# Altium PCB pastilda.PcbDoc
Units mm, origin at the board's own origin, x right, y up, seen from the top; angles counter-clockwise.
Board outline 40 x 17 mm, 4 copper layers (Top Layer, Ground, Power, Bottom Layer), stack 1.58 mm thick; 46 components, 39 nets, 188 pads, 88 vias.
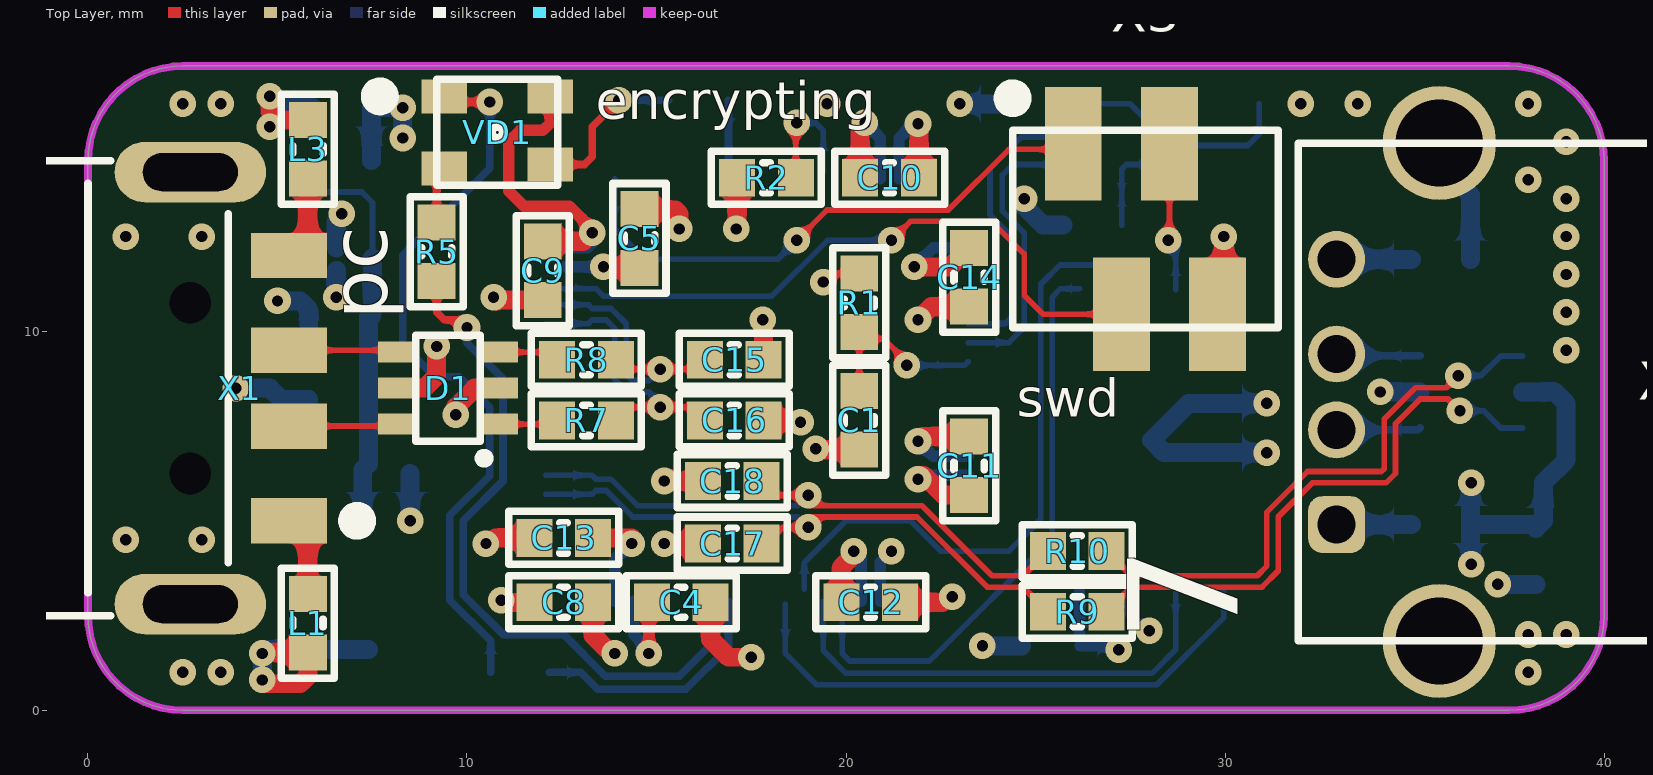
[diagram p0: Top Layer view]
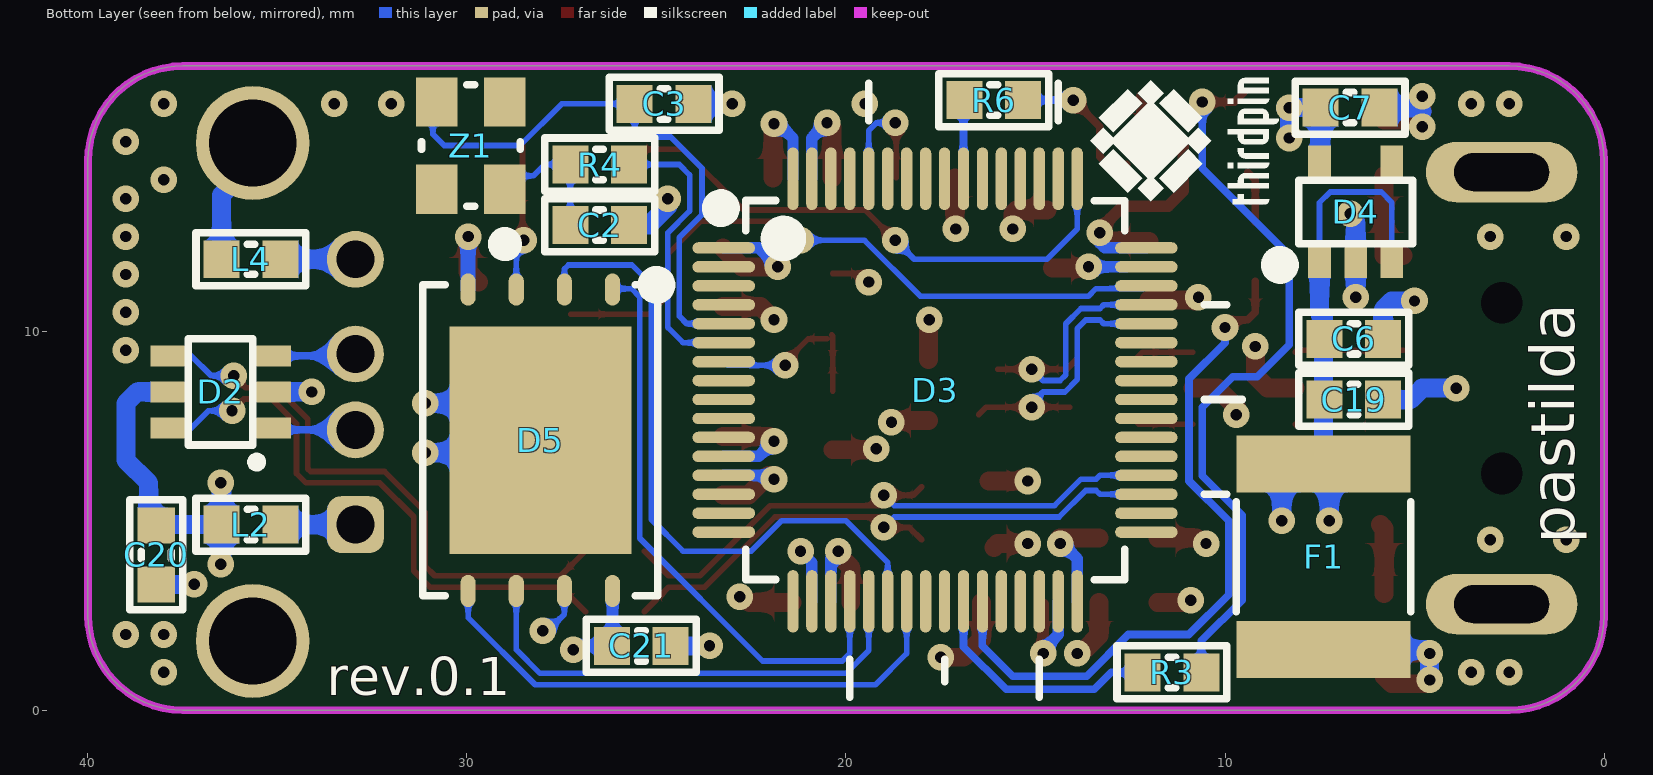
[diagram p1: Bottom Layer view, seen from below]
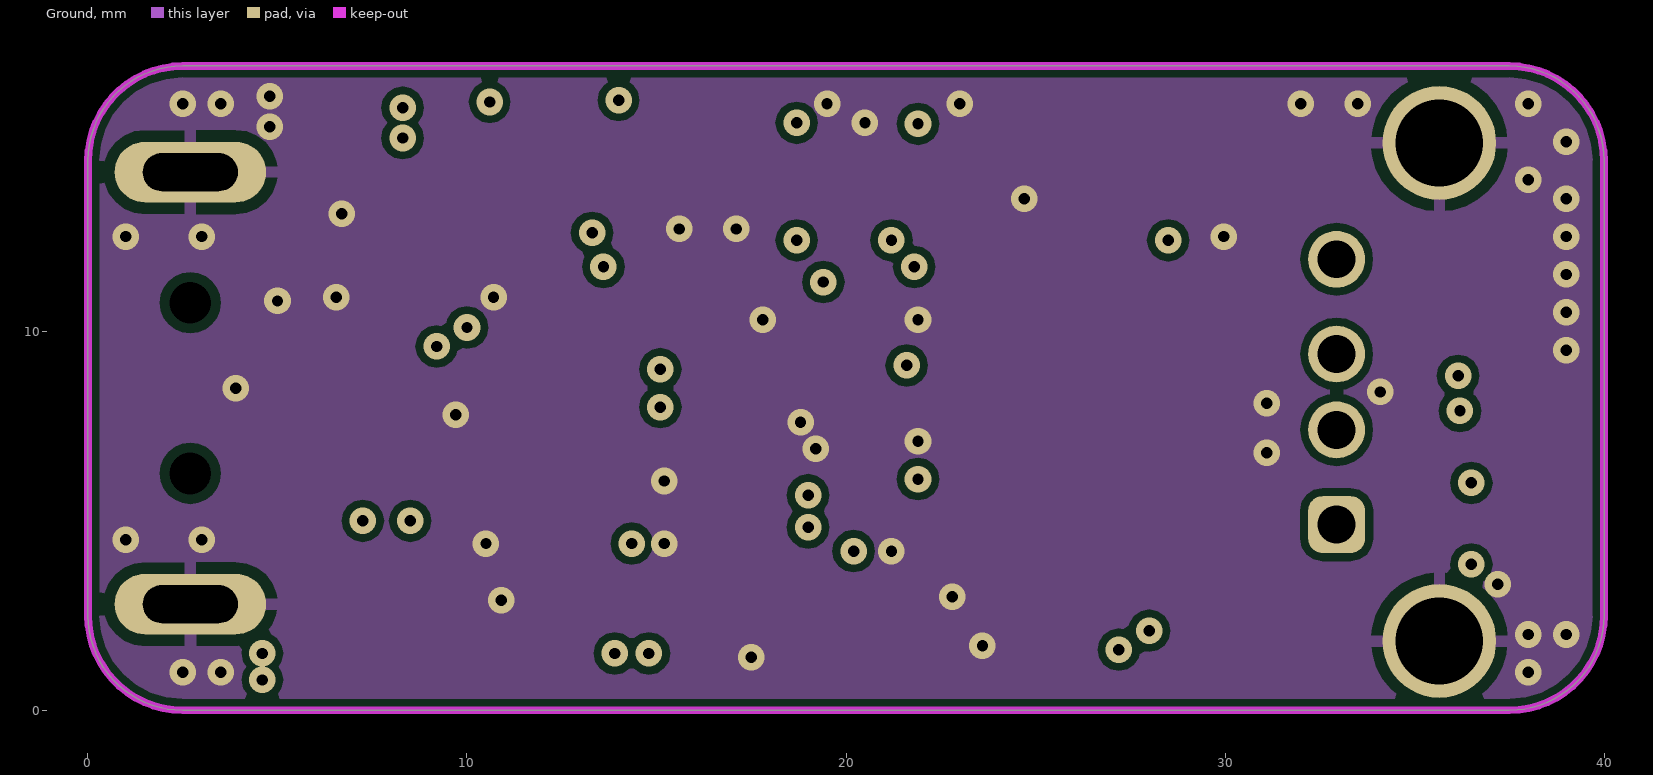
[diagram p2: Ground]
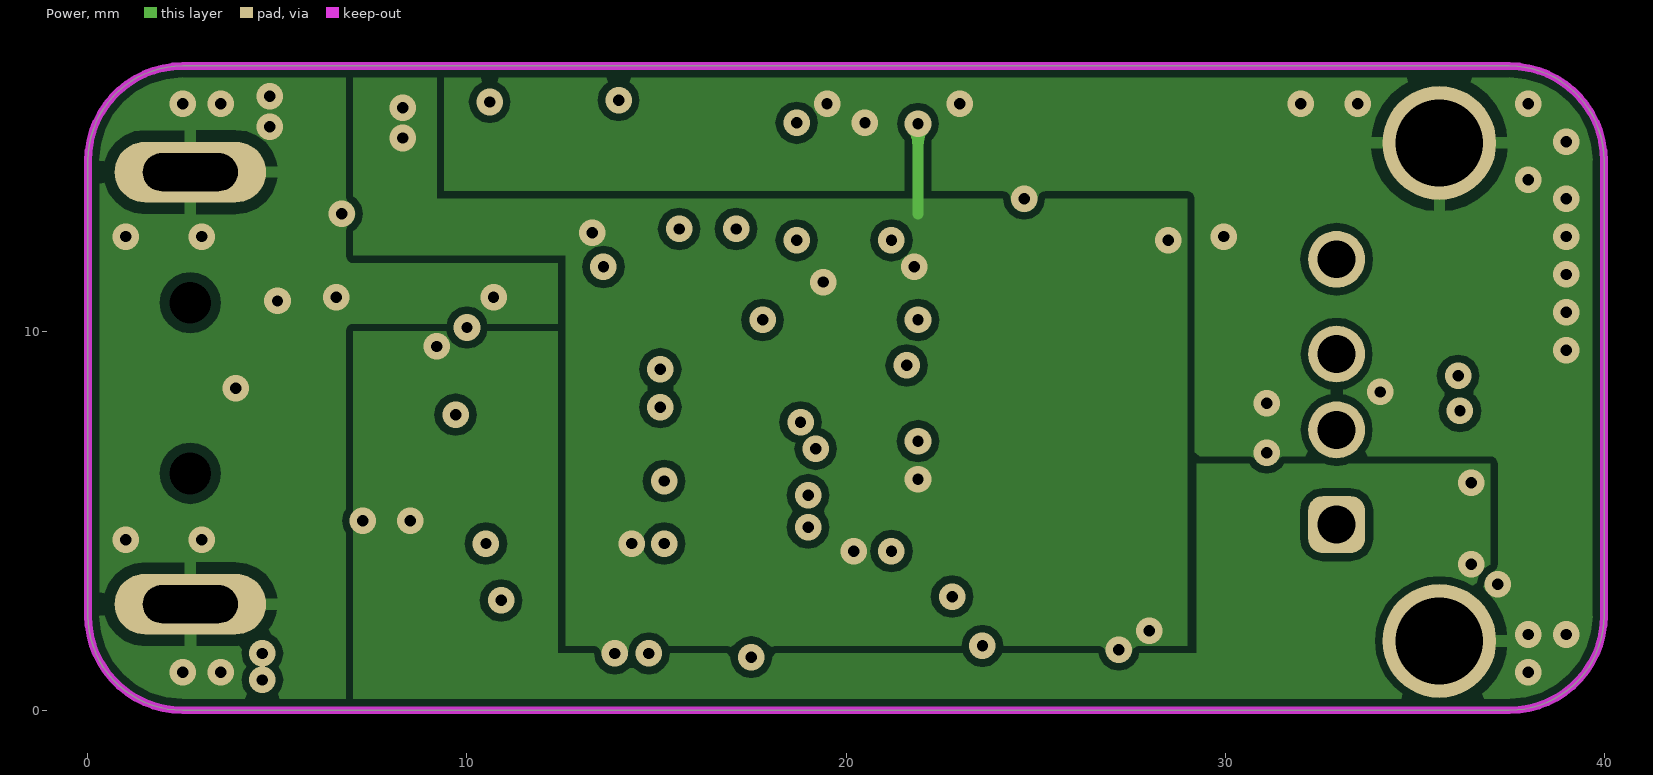
[diagram p3: Power]

## Layer stack, top to bottom
Top Solder: solder mask 0.0102, Solder Resist, Dk 3.5
Top Layer: signal copper 0.018
2116x2: prepreg 0.254, FR-4, Dk 4.25
Ground: signal copper 0.018
Dielectric 3: core 1, FR-4, Dk 4.6
Power: signal copper 0.018
2116x2: prepreg 0.254, FR-4, Dk 4.25
Bottom Layer: signal copper 0.018
Bottom Solder: solder mask 0.0102, Solder Resist, Dk 3.5

## Board outline
0,2.5 0,14.5 cw(c2.5,14.5) 2.5,17 37.5,17 cw(c37.5,14.5) 40,14.5 40,2.5 cw(c37.5,2.5) 37.5,0 2.5,0 cw(c2.5,2.5)

## Design rules (kind name [scope] priority, off if disabled: settings)
AssemblyTestpoint [All] p1: testpointundercomponent=TRUE minsize=1.016 maxsize=2.54 preferedsize=1.524 minholesize=0 maxholesize=1.016 preferedholesize=0.813 testpointgrid=0.025 usegrid=FALSE gridtolerance=0 allowsidetop=TRUE allowsidebottom=TRUE
Clearance "MH pow gnd" [IsPadHoleValid and not PadIsPlated] p1: gap=0.25
Clearance Clearance_Poly_inside [InPolygonClass('All Polygons') and OnMid] p2: gap=0.2
Clearance Clearance_Poly_outside [InPolygonClass('All Polygons') and OnOutside] p3: gap=0.2
Clearance Clearance_inside [All vs OnMid] p4: gap=0.15
Clearance Clearance_all [All] p5: gap=0.15
ComponentClearance [Not InComponentClass('ConnectorsVIol') vs Not InComponentClass('ConnectorsVIol')] p1: gap=0.1 collisioncheckmode=3 verticalgap=0.1 showdistances=FALSE
DiffPairsRouting [All] p1: maxlimit=0.3 minlimit=0.15 mostfreqgap=0.2 toplayer_prefgap=0.15 toplayer_minwidth=0.15 toplayer_maxwidth=0.381 toplayer_prefwidth=0.2 midlayer1_mingap=0.2 midlayer1_minwidth=0.2 midlayer1_maxwidth=0.381 midlayer1_prefwidth=0.2 midlayer2_mingap=0.2 midlayer2_minwidth=0.2 midlayer2_maxwidth=0.381 midlayer2_prefwidth=0.2 bottomlayer_prefgap=0.15 bottomlayer_minwidth=0.15 bottomlayer_maxwidth=0.381 bottomlayer_prefwidth=0.2 maxuncoupledlength=20
FabricationTestpoint [All] p1: side=3 testpointundercomponent=TRUE minsize=1.016 maxsize=2.54 preferedsize=1.524 minholesize=0 maxholesize=1.016 preferedholesize=0.813 testpointgrid=0.025 allowsidetop=TRUE allowsidebottom=TRUE usegrid=FALSE gridtolerance=0
Height [All] p1: minheight=0 maxheight=18 prefheight=9
HoleSize [All] p1: absolutevalues=TRUE maxlimit=12 minlimit=0.3 maxpercent=80.000 minpercent=20.000
MinimumSolderMaskSliver [All] p1: minsoldermaskwidth=0
PlaneClearance PlaneClearance_2 [OnLayer('Power')] p1: clearance=0.4
PlaneClearance PlaneClearance_1 [OnLayer('GND')] p2: clearance=0.4
PlaneClearance [All] p3: clearance=0.3
PolygonConnect Direct_PadClass [inpadclass('Direct')] p1: connectstyle=Direct reliefconductorwidth=0.254 reliefentries=4 polygonreliefangle="90 Angle" airgapwidth=0.254
PolygonConnect Thru_OnMid [IsThruPin vs OnMid] p2: connectstyle=Relief reliefconductorwidth=0.3 reliefentries=4 polygonreliefangle="90 Angle" airgapwidth=0.3
PolygonConnect Direct_PolyClass [IsSMTPin vs InPolygonClass('direct')] p3: connectstyle=Direct reliefconductorwidth=0.4 reliefentries=4 polygonreliefangle="90 Angle" airgapwidth=0.254
PolygonConnect Poly_Via [isVia vs IsPolygon] p4: connectstyle=Direct reliefconductorwidth=0.254 reliefentries=4 polygonreliefangle="90 Angle" airgapwidth=0.254
PolygonConnect all [All] p5: connectstyle=Relief reliefconductorwidth=0.254 reliefentries=4 polygonreliefangle="90 Angle" airgapwidth=0.254
RoutingVias [All] p1: holewidth=0.3 width=0.7 viastyle="Through Hole" minholewidth=0.3 minwidth=0.7 maxholewidth=0.5 maxwidth=1
ShortCircuit ShortCircuit_MH [InPadClass('Plated mounting holes') vs OnLayer('Keep-Out Layer')] p1: allowed=TRUE
ShortCircuit [All] p2: allowed=FALSE
SilkToBoardRegionClearance [not All] p1:
SilkToSilkClearance [All vs not All] p1: silktosilkclearance=0.254
SilkToSolderMaskClearance SilkscreenOverComponentPads [IsPad] p1: minsilkscreentomaskgap=-1 clearancetoexposedcopper=TRUE
SolderMaskExpansion Via [IsVia] p1: expansion=-1
SolderMaskExpansion [All] p2: expansion=0.075
Width Width_inside [OnMid] p1: maxlimit=5 minlimit=0.2 preferedwidth=0.3
Width [All] p2: maxlimit=5 minlimit=0.15 preferedwidth=0.3
18 further rules are at their usual default settings.

## Classes and differential pairs
pad class "Mounting Holes": X1-0
differential pair F_OTG_HS_D: +F_OTG_HS_D_P -F_OTG_HS_D_N
differential pair OTG_HS_D: +OTG_HS_D_P -OTG_HS_D_N
differential pair OTG_FS_D: +OTG_FS_D_P -OTG_FS_D_N

## Components (designator, comment, footprint, x,y, rotation, side; value= is the part's Value field where it differs from the comment)
C1 "C" 0603C 20.35,7.65 r90 top
C2 "C" 0603C 26.5,12.8 r180 bottom
C3 "C" 0603C 24.8,16 r180 bottom
C4 "C" 0603C 15.65,2.85 r0 top
C5 "C" 0603C 14.55,12.45 r90 top
C6 "C" 0603C 6.6,9.8 r0 bottom
C7 "C" 0603C 6.7,15.9 r0 bottom
C8 "C" 0603C 12.55,2.85 r0 top
C9 "C" 0603C 12,11.6 r90 top
C10 "C" 0603C 21.15,14.05 r0 top
C11 "C" 0603C 23.25,6.45 r270 top
C12 "C" 0603C 20.65,2.85 r180 top
C13 "C" 0603C 12.55,4.55 r0 top
C14 "C" 0603C 23.25,11.425 r90 top
C15 "C" 0603C 17.05,9.25 r180 top
C16 "C" 0603C 17.05,7.65 r180 top
C17 "C" 0603C 17,4.4 r0 top
C18 "C" 0603C 17,6.05 r0 top
C19 "C" 0603C 6.6,8.2 r0 bottom
C20 "C" 0603C 38.2,4.1 r90 bottom
C21 "C" 0603C 25.4,1.7 r0 bottom
D1 "USBLC6-2" SOT23-6 9.5,8.5 r180 top
D2 "USBLC6-2" SOT23-6 36.5,8.4 r0 bottom
D3 "STM32F405RG" LQFP64 17.65,8.45 r180 bottom
D4 "TPS76333DBV" SOT23-5 6.553,13.15 r90 bottom
D5 "SST25VF064C-80-4I-Q2A" WSON8_6X8 28.065,7.125 r270 bottom
F1 "MF-SMDF050-2" F2018 7.4,1.6 r90 bottom
L1 "BLM18AG" 0603C 5.8,2.3 r270 top
L2 "BLM18AG" 0603C 35.7,4.9 r180 bottom
L3 "BLM18AG" 0603C 5.8,14.8 r90 top
L4 "BLM18AG" 0603C 35.7,11.9 r180 bottom
R1 "R" 0603R 20.35,10.75 r90 top
R2 "R" 0603R 17.9,14.05 r180 top
R3 "R" 0603R 11.4,1 r180 bottom
R4 "R" 0603R 26.5,14.4 r0 bottom
R5 "R" 0603R 9.2,12.1 r90 top
R6 "R" 0603R 16.1,16.1 r180 bottom
R7 "R" 0603R 13.15,7.65 r0 top
R8 "R" 0603R 13.15,9.25 r0 top
R9 "R" 0603R 26.1,2.6 r180 top
R10 "R" 0603R 26.1,4.2 r180 top
VD1 "FYLS-3528RGBC" FYLS-3528 10.8,15.25 r180 top
X1 "1734028-1" 1734028-1 2.7,8.5 r270 top locked
X2 "292303-1" 292303-1 34.3,8.4 r90 top locked
X3 "7-188275-4" 7-188275-4 27.9,12.7 r0 top
Z1 "KX-7" KX-7 29.9,14.9 r90 bottom

## Footprints (in the part's own frame and the unit in brackets; to place one, negate y for a bottom-side part, rotate by r counter-clockwise, add the part's x,y. Pads: shape width x height; smd on the part's side, far side on the other; paste and mask are expansions set on the pad)
7-188275-4 [mm]
  rect 1.5x3 smd: 1(-1.905,2.25) 2(-0.635,-2.25) 3(0.635,2.25) 4(1.905,-2.25)
  silkscreen extent -3.75,-2.6 3.51,3.7, body extent -3.51,-3.45 3.51,3.45, height 5.3
0603C [mm] "Chip Cap, 2-Leads, Body 1,5x0,8mm, IPC Medium Density"
  rect 0.95x1 smd: 1(-0.775,0) 2(0.775,0)
  Top Layer pour cut-out: -0.4,0.6 0.4,0.6 0.4,-0.6 -0.4,-0.6
  silkscreen extent -1.45,-0.7 1.45,0.7, body extent -0.93,-0.41 0.93,0.41, height 0.81
0603R [mm] "Chip Resistor, 2-Leads, Body 1,5x0,8mm, IPC Medium Density"
  rect 0.95x1 smd: 1(-0.775,0) 2(0.775,0)
  Top Layer pour cut-out: -0.4,0.6 0.4,0.6 0.4,-0.6 -0.4,-0.6
  silkscreen extent -1.45,-0.7 1.45,0.7, body extent -0.82,-0.41 0.82,0.41, height 0.46
292303-1 [mm] "USB A R/A RCPT ASSY THRU HOLE"
  round 3 hole 2.3: 0(-6.57,-1.355) 0(6.57,-1.355)
  rrect50% 1.5x1.5 hole 1: 1(-3.5,1.355)
  round 1.5 hole 1: 2(-1,1.355) 3(1,1.355) 4(3.5,1.355)
  silkscreen extent -6.57,-11.63 6.57,2.37, body extent -8.12,-11.63 8.12,2.37, height 7.65
1734028-1 [mm] "USB CONN,Plug R/A SMT"
  oval 1.6x4 hole 1 slot 2.5 at 90 deg: 0(-5.7,0) 0(5.7,0)
  round 0 hole 1.1 unplated: 0(-2.25,0) 0(2.25,0)
  rect 1.2x2 smd: 1(3.5,2.6) 2(1,2.6) 3(-1,2.6) 4(-3.5,2.6)
  silkscreen extent -6,-17.65 6,4.65, body extent -6.45,-17.65 6.45,3.2, height 3
F2018 [mm]
  rect 1.5x4.6 smd: 1(0,0) 2(4.9,0)
  silkscreen extent 1,-2.3 3.9,2.3, body extent -0.27,-2.26 5.17,2.25, height 2.03
FYLS-3528 [mm]
  rect 1.2x0.9 smd: 1(1.4,-0.95) 2(-1.4,-0.95) 3(-1.4,0.85) 4(1.4,0.95)
  silkscreen extent -1.6,-1.4 3.35,1.4, body extent -1.75,-1.4 1.75,1.4, height 1.95
KX-7 [mm] "Quartz"
  rect 1.3x1.1 smd: 1(-1.15,-0.9) 2(1.15,0.9) 3(1.15,-0.9) 4(-1.15,0.9)
  silkscreen extent -2.8,-1.3 1.6,1.3, body extent -1.6,-1.3 1.6,1.3, height 0.8
LQFP64 [mm] "LQFP64 – 10 x 10 mm 64 pin low-profile quad flat package"
  oval 1.65x0.3 smd: 1(-5.575,3.75) 2(-5.575,3.25) 3(-5.575,2.75) 4(-5.575,2.25) 5(-5.575,1.75) 6(-5.575,1.25) 7(-5.575,0.75) 8(-5.575,0.25) 9(-5.575,-0.25) 10(-5.575,-0.75) 11(-5.575,-1.25) 12(-5.575,-1.75) 13(-5.575,-2.25) 14(-5.575,-2.75) 15(-5.575,-3.25) 16(-5.575,-3.75) 33(5.575,-3.75) 34(5.575,-3.25) 35(5.575,-2.75) 36(5.575,-2.25) 37(5.575,-1.75) 38(5.575,-1.25) 39(5.575,-0.75) 40(5.575,-0.25) 41(5.575,0.25) 42(5.575,0.75) 43(5.575,1.25) 44(5.575,1.75) 45(5.575,2.25) 46(5.575,2.75) 47(5.575,3.25) 48(5.575,3.75)
  oval 0.3x1.65 smd: 17(-3.75,-5.575) 18(-3.25,-5.575) 19(-2.75,-5.575) 20(-2.25,-5.575) 21(-1.75,-5.575) 22(-1.25,-5.575) 23(-0.75,-5.575) 24(-0.25,-5.575) 25(0.25,-5.575) 26(0.75,-5.575) 27(1.25,-5.575) 28(1.75,-5.575) 29(2.25,-5.575) 30(2.75,-5.575) 31(3.25,-5.575) 32(3.75,-5.575) 49(3.75,5.575) 50(3.25,5.575) 51(2.75,5.575) 52(2.25,5.575) 53(1.75,5.575) 54(1.25,5.575) 55(0.75,5.575) 56(0.25,5.575) 57(-0.25,5.575) 58(-0.75,5.575) 59(-1.25,5.575) 60(-1.75,5.575) 61(-2.25,5.575) 62(-2.75,5.575) 63(-3.25,5.575) 64(-3.75,5.575)
  silkscreen extent -5.9,-8.1 8.1,8.1, body extent -6,-6 6,6, height 1.5
SOT23-5 [mm] "SOT23, 5-Leads, Body 3,0x3,0mm (max), Pitch 0,95mm, IPC Medium Density"
  rect 1x0.6 smd: 1(-1.25,0.953) 2(-1.25,0) 3(-1.25,-0.953) 4(1.25,-0.953) 5(1.25,0.953)
  silkscreen extent -1.65,-1.5 0.83,2.25, body extent -1.5,-1.5 1.5,1.5, height 1.3
SOT23-6 [mm]
  rect 1x0.55 smd: 1(-1.35,0.95) 2(-1.35,0) 3(-1.35,-0.95) 4(1.35,-0.95) 5(1.35,0) 6(1.35,0.95)
  silkscreen extent -1.08,-1.4 0.85,1.97, body extent -1.4,-1.45 1.4,1.45, height 1.45
WSON8_6X8 [mm]
  oval 0.85x0.4 smd: 1(-3.975,1.905) 2(-3.975,0.635) 3(-3.975,-0.635) 4(-3.975,-1.905) 5(3.975,-1.905) 6(3.975,-0.635) 7(3.975,0.635) 8(3.975,1.905)
  rect 6x4.8 smd: 9(0,0)
  silkscreen extent -4.35,-3.1 4.1,3.31, body extent -4.05,-3.05 4.05,3.05, height 0.8

## Part data
C1 C9 C10 C11 C12 C13 C14 C21: library part "C cer 0603 X7R 0.1мк 50В 10% -55…125", "Керамический ЧИП конденсатор"
C2 C3 C15 C16 C17 C18: library part "C cer 0603 NPO 20 50В 5% -55…125", "Керамический ЧИП конденсатор"
C4 C5: library part "C cer 0603 X7R 2.2мк 10В 10% -55…125", "Керамический ЧИП конденсатор"
C6: library part "C cer 0603 X5R 10мк 6.3В 20% -55…85", "Керамический ЧИП конденсатор"
C7 C8: library part "C cer 0603 X5R 1мк 25В 10% -55…85", "Керамический ЧИП конденсатор"
C19 C20: library part "C cer 0603 X7R 0.01мк 50В 10% -55…125", "Керамический ЧИП конденсатор"
D1 D2: library part USBLC6-2SC6, "Very low capacitance ESD protection"
D3: "Микроконтроллер Cortex-M4 1Mb"
D4: "LDO 150mA 3.3-10V to 3.3V"
D5: "64 Mbit SPI Serial Dual I/O Flash"
F1: "Предохранитель"
L1 L2 L3 L4: library part BLM18AG601SN1, "Фильтр"
R1 R2: library part "R 0603 10к 5%", "ЧИП резистор"
R3 R5 R6: library part "R 0603 510 5%", "ЧИП резистор"
R4: library part "R 0603 300 5%", "ЧИП резистор"
R7 R8 R9 R10: library part "R 0603 24 1%", "ЧИП резистор"
VD1: "RGB Светодиод"
X1: "USB A вилка на плату SMD"
X2: "USB A розетка на плату"
X3: "Розетка на плату"
Z1: library part "KX – 7_25M", "Кварцевый резонатор"

## Via types
v1: diameter 0.7, hole 0.3, Top Layer to Bottom Layer, 88 vias

## Nets (pads, with @x,y where several pads share a name; then routed paths per layer and width w, separated by ;. In a path a pad name is that pad's centre, name@x,y a point inside that pad or via, vN(x,y) a via of type N, cw(c..) or ccw(c..) an arc to the next point about the centre after c; other vN are vias at no path point)
3V3: C7.2 C8.2 C9.2 C10.2 C11.2 C12.2 C13.2 C14.2 C21.2 D3.1 D3.13 D3.19 D3.32 D3.48 D3.64 D4.5 D5.3 D5.7 D5.8 R1.2 VD1.2 X3.3 | length 39.4
  Top Layer w0.15: v1(19.4,11.3) 19.625,11.525 R1.2 ; v1@28.5,12.5 28.535,12.535 X3.3
  Top Layer w0.3: VD1.2 12.2,15.5 12,15.3 11.4,15.3 11.1,15 11.1,13.7 11.5,13.3 12.7,13.3 v1@13.2,12.8
  Top Layer w0.5: C9.2 13.075,12.375 v1(13.3,12.6) ; C8.2 13.325,1.975 v1@13.7,1.6 ; C13.2 14.35,4.55 v1@14.4,4.5 ; C12.2 19.875,3.775 v1@20.2,4.1 ; v1(21.8,11.7) 22.75,11.7 C14.2 ; v1@21.876,6.2 22.05,6.2 22.575,5.675 C11.2 ; v1@21.876,15.5 21.925,15.451 C10.2
  Power w0.3: 21.9,13.1 v1(21.9,15.475)
  Bottom Layer w0.15: D5.7 27.43,2.536 27.866,2.1 v1(28,2.1) ; v1(28.5,12.4) 28.7,12.2 D5.3
  Bottom Layer w0.3: D3.48 13.174,12.2 13.3,12.326 v1(13.3,12.6) ; D3.32 13.9,4 14.3,4.4 v1(14.35,4.4) ; v1(20.2,4.2) 20.4,4 D3.19 ; D3.64 21.4,15.1 21.775,15.475 v1(21.9,15.475) ; v1(21.8,11.7) 22.3,12.2 D3.1 ; v1(21.9,6.1) 22,6.2 D3.13 ; C21.2@26.16,1.915 D5.8 ; C21.2 27.1,1.7 v1(27.2,1.6)
  Bottom Layer w0.5: D4.5@7.475,14.5 C7.2 8.4,15.9 v1(8.3,15.9) v1(8.3,15.1)
  other v1: 13.9,1.5
5V: C6.2 C19.2 C20.2 D1.5 D2.5 D4.1 D4.3 F1.2 L2.1 | length 24.2
  Top Layer w0.5: D1.5 8.875,8.5 9.2,8.825 v1(9.2,9.6)
  Bottom Layer w0.15: D4.3 5.6,13.4 5.875,13.675 7.225,13.675 7.506,13.394 7.506,11.931 D4.1
  Bottom Layer w0.5: v1(7.25,5) 7.25,6.35 F1.2 7.4,10.325 7.475,10.4 ; 7.4,10.4 7.506,10.506 D4.1 ; D4.1@7.475,11.9 D4.1@7.506,11.931 ; v1(8.5,5) F1.2@8.5,6.25 ; v1(36.5,3.85) 36.5,3.9 36.475,3.925 L2.1 ; v1(36.5,6) 36.475,5.975 L2.1 ; D2.5 38.7,8.4 39,8.1 39,6.6 38.4,6 38.4,5 C20.2@38.2,4.8 ; C20.2@38.2,4.9 L2.1
BOOT0: D3.60 R2.1 | length 3.3
  Top Layer w0.15: R2.1 18.675,15.475 v1(18.7,15.5)
  Bottom Layer w0.15: v1(18.7,15.5) 19.2,15.5 19.4,15.3 D3.60@19.4,14.2
F_OTG_HS_D_N: D2.6 R9.1 | length 15.2
  Top Layer w0.15: R9.1 27.525,3.25 30.974,3.25 31.405,3.681 31.405,5.105 32.3,6 34.25,6 34.5,6.25 34.5,7.562 35.15,8.212 35.887,8.212 v1(36.2,7.9)
  Bottom Layer w0.15: v1(36.2,7.9) 36.825,7.9 37.275,7.45 D2.6
F_OTG_HS_D_P: D2.4 R10.1 | length 15.2
  Top Layer w0.15: R10.1 27.525,3.55 30.85,3.55 31.105,3.805 31.105,5.229 32.176,6.3 34.126,6.3 34.2,6.374 34.2,7.687 35.026,8.512 35.837,8.512 v1(36.15,8.825)
  Bottom Layer w0.15: v1(36.15,8.825) 36.75,8.825 37.275,9.35 D2.4
GND: C1.1 C2.2 C3.2 C4.2 C5.2 C6.1 C7.1 C8.1 C9.1 C10.1 C11.1 C12.1 C13.1 C14.1 C15.1 C16.1 C17.1 C18.1 C19.1 C20.1 C21.1 D1.2 D2.2 D3.12 D3.18 D3.63 D4.2 D5.4 D5.9 L3.2 L4.1 R2.2 X1.0@2.7,2.8 X1.0@2.7,14.2 X2.0 X3.4 | length 50.3
  Top Layer w0.5: v1(4.8,16.2) 4.8,15.8 5.025,15.575 L3.2 ; v1(9.7,7.8) 9.7,8 10.2,8.5 D1.2 ; v1@10.6,4.4 10.75,4.55 C13.1 ; v1(10.7,10.9) 10.8,10.8 10.825,10.825 C9.1 ; v1@10.8,2.9 10.85,2.85 C8.1 ; C5.2@14.7,13.2 15.5,13.2 15.6,13.1 v1(15.6,12.7) ; v1(15.2,4.4) 16,4.4 C17.1@16.1,4.3 ; v1@15.4,6.1 15.45,6.05 C18.1 ; C4.2 16.425,1.875 16.9,1.4 v1(17.5,1.4) ; v1(17.1,12.7) 17.125,12.725 R2.2 ; C16.1 18.75,7.65 v1(18.8,7.6) ; C15.1 17.825,10.225 v1@17.9,10.3 ; v1@19.4,6.9 19.425,6.875 C1.1 ; C10.1 20.375,15.375 v1@20.4,15.4 ; C12.1 22.55,2.85 v1@22.7,3 ; v1(21.9,10.3) 22.25,10.65 C14.1 ; v1@22,7.2 22.025,7.225 C11.1 ; X3.4@29.7,11.3 29.97,11.57 v1(29.97,12.5)
  Bottom Layer w0.3: v1(20.5,15.5) 20.9,15.1 D3.63 ; D3.18 20.9,3.9 v1(21.2,4.2) ; v1(21.9,7.1) 22.3,6.7 D3.12
  Bottom Layer w0.4: D5.4 v1(29.97,12.5)
  Bottom Layer w0.5: v1@4,8.5 4.8,8.5 5.1,8.2 C19.1 ; 4.8,15.8 4.9,15.9 C7.1 ; v1@5.1,10.8 5.6,10.8 5.825,10.575 C6.1 ; v1(6.553,10.9) D4.2@6.553,11.6 ; D4.2@6.553,12.2 6.553,12.929 6.7,13.076 v1(6.7,13.1) ; v1(23,16) C3.2 ; v1(23.6,1.7) C21.1 ; v1(24.7,13.5) 24.7,13.3 25.2,12.8 C2.2 ; v1(31.1,6.8) 28.39,6.8 D5.9 29.04,8.1 v1(31.1,8.1) ; v1(34.1,8.4) D2.2 ; X2.0@35.8,14.275 36.475,13.6 L4.1 ; v1(37.2,3.325) C20.1
  other v1: 2.5,1 3.5,1 38,1 38,2 39,2 10.9,2.9 22.8,3 10.5,4.4 1,4.5 3,4.5 15.2,6.05 19.2,6.9 3.9,8.5 39,9.5 17.8,10.3 39,10.5 5,10.8 39,11.5 1,12.5 3,12.5 39,12.5 39,13.5 38,14 39,15 4.8,15.4 2.5,16 3.5,16 19.5,16 32,16 33.5,16 38,16
LED_B: D3.55 R6.1 | length 2.1
  Bottom Layer w0.2: D3.55 R6.1@16.9,16.1
LED_G: D3.27 R5.1 | length 18.4
  Top Layer w0.2: R5.1 9.2,10.5 9.4,10.3 9.9,10.3 v1@10.1,10.1
  Bottom Layer w0.2: v1(10,10.1) 10,9.7 10.95,8.75 10.95,6.05 9.9,5 9.9,3.051 10.951,2 12.551,2 13.651,0.9 15.6,0.9 16.4,1.7 D3.27@16.4,2.6
LED_R: D3.26 R3.1 | length 6.6
  Bottom Layer w0.2: R3.1 13,1 13.45,0.55 15.775,0.55 16.9,1.675 D3.26
NetC2_1: C2.1 R4.2 Z1.1 | length 3.7
  Bottom Layer w0.15: C2.1 27.275,14.275 27.4,14.4 27.95,14.4 28.25,14.1 29,14.1 Z1.1@29.2,13.9
NetC3_1: C3.1 D3.5 Z1.2 | length 15
  Bottom Layer w0.15: D3.5 24.2,10.2 24.4,10.4 24.4,12.476 23.8,13.076 23.8,14.3 24.5,15 24.625,15.125 25.4,15.125 25.575,15.3 C3.1 27.5,16 28.6,14.9 30.6,14.9 30.9,15.2 Z1.2@30.9,16
NetC4_1: C4.1 D3.31 | length 2.8
  Top Layer w0.3: v1(14.8,1.5) C4.1@14.8,2.8
  Bottom Layer w0.3: D3.31 14.4,2 14.8,1.6 v1(14.8,1.5)
NetC5_1: C5.1 D3.47 | length 2
  Top Layer w0.5: v1(13.6,11.7) 13.625,11.675 C5.1
  Bottom Layer w0.3: D3.47@12.6,11.7 v1(13.6,11.7)
NetD1_1: D1.1 R7.1 | length 1.6
  Top Layer w0.15: D1.1 12.275,7.55 R7.1
NetD1_3: D1.3 R8.1 | length 1.6
  Top Layer w0.15: D1.3 12.175,9.45 R8.1
NetD1_4: D1.4 X1.3 | length 2.9
  Top Layer w0.15: X1.3 8.1,9.5 D1.4
NetD1_6: D1.6 X1.2 | length 2.9
  Top Layer w0.15: X1.2 8.1,7.5 D1.6
NetD2_1: D2.1 X2.2 | length 2.2
  Bottom Layer w0.2: X2.2 35.1,7.4 D2.1
NetD2_3: D2.3 X2.3 | length 2.2
  Bottom Layer w0.2: X2.3 32.995,9.35 D2.3
NetD3_6: D3.6 R4.1 | length 7.6
  Bottom Layer w0.15: D3.6 24.3,9.7 24.7,10.1 24.7,12.6 24.125,13.175 24.125,14.125 24.4,14.4 R4.1
NetF1_1: F1.1 L1.2 | length 6.5
  Top Layer w0.5: v1@4.7,0.7 5.6,0.7 5.8,0.9 L1.2 4.725,1.525 v1@4.7,1.5
  Bottom Layer w0.5: v1(4.6,0.8) v1(4.6,1.5) 4.7,1.6 F1.1
NetL1_1: L1.1 X1.1 | length 1.9
  Top Layer w0.5: L1.1 5.8,3.9 5.8,4.8 X1.1@5.9,4.9
NetL2_2: L2.2 X2.1 | length 2
  Bottom Layer w0.5: X2.1 L2.2
NetL3_1: L3.1 X1.4 | length 2.6
  Top Layer w0.5: X1.4 5.8,12 L3.1@5.8,14.1
NetL4_2: L4.2 X2.4 | length 1.9
  Bottom Layer w0.5: X2.4@33,11.9 L4.2
NetR3_2: R3.2 VD1.1 | length 19.4
  Top Layer w0.2: VD1.1@9.5,16.3 9.75,16.05 v1(10.6,16.05)
  Bottom Layer w0.2: v1(10.6,16.05) 10.6,14.3 8.3,12 8.3,9.651 9.151,8.8 9.8,8.8 10.6,8 10.6,6.195 9.55,5.145 9.55,2.906 10.625,1.831 R3.2
NetR5_2: R5.2 VD1.4 | length 1.4
  Top Layer w0.2: R5.2 9.2,14 VD1.4@9.4,14.2
NetR6_2: R6.2 VD1.3 | length 3.9
  Top Layer w0.2: VD1.3@12.6,14.4 13.1,14.4 13.3,14.6 13.3,15.4 v1(14,16.1)
  Bottom Layer w0.2: v1(14,16.1) R6.2
NRST: C1.2 D3.7 R1.1 | length 4.6
  Top Layer w0.15: C1.2 20.35,9.875 R1.1@20.375,9.9 ; R1.1@20.5,9.8 21,9.8 21.6,9.2 v1(21.6,9.1)
  Bottom Layer w0.15: v1(21.6,9.1) 23.125,9.1 D3.7
OTG_FS_D_N: C16.2 D3.44 R7.2 | length 7.4
  Top Layer w0.15: R7.2@14.1,8 v1(15.1,8) 16.3,8 C16.2@16.5,7.8
  Bottom Layer w0.15: D3.44 13.2,10.2 13.3,10.3 13.676,10.3 13.9,10.076 13.9,8.726 14.226,8.4 14.8,8.4 15.1,8.1 v1(15.1,8)
OTG_FS_D_P: C15.2 D3.45 R8.2 | length 6.9
  Top Layer w0.15: R8.2 14.175,9 v1(15.1,9) C15.2@16,9
  Bottom Layer w0.15: D3.45 13.2,10.7 13.3,10.6 13.8,10.6 14.2,10.2 14.2,8.85 14.35,8.7 14.8,8.7 v1(15.1,9)
OTG_HS_D_N: C17.2 D3.35 R9.2 | length 16.1
  Top Layer w0.15: C17.2@18,4.5 18.325,4.825 v1(19,4.825) 19,5 19.1,5.1 21.876,5.1 23.726,3.25 24.675,3.25 R9.2
  Bottom Layer w0.15: D3.35 13.3,5.7 13.4,5.8 13.676,5.8 14.376,5.1 18.725,5.1 v1(19,4.825)
OTG_HS_D_P: C18.2 D3.36 R10.2 | length 16
  Top Layer w0.15: C18.2@18,5.9 18.225,5.675 v1(19,5.675) 19,5.5 19.1,5.4 22,5.4 23.85,3.55 24.675,3.55 R10.2
  Bottom Layer w0.15: D3.36 13.295,6.2 13.395,6.1 13.8,6.1 14.5,5.4 18.725,5.4 v1(19,5.675)
SPI1_MISO: D3.22 D5.2 | length 17.4
  Bottom Layer w0.15: D3.22@18.9,3.2 18.9,3.9 20,5 21.7,5 22.5,4.2 24.3,4.2 25.14,5.04 25.14,11.24 25.65,11.75 27.325,11.75 27.43,11.645 D5.2
SPI1_MOSI: D3.23 D5.5 | length 14.6
  Bottom Layer w0.15: D3.23@18.4,2.8 18.4,1.5 19.225,0.675 28.199,0.675 29.97,2.446 D5.5
SPI1_NSS: D3.20 D5.1 | length 15.5
  Bottom Layer w0.15: D3.20 19.9,1.5 20.1,1.3 22.2,1.3 25.44,4.54 25.44,10.906 25.659,11.125 D5.1@26.16,11.125
SPI1_SCK: D3.21 D5.6 | length 12.7
  Bottom Layer w0.15: D3.21 19.4,1.576 20.001,0.975 28.075,0.975 28.7,1.6 D5.6
SWCLK: D3.49 X3.1 | length 15.1
  Top Layer w0.15: v1(18.7,12.4) 19.5,13.2 22.7,13.2 24.3,14.8 X3.1@26.1,14.8
  Bottom Layer w0.15: D3.49 13.9,12.7 14.7,11.9 18.2,11.9 v1(18.7,12.4)
SWDIO: D3.46 X3.2 | length 17.8
  Top Layer w0.15: v1(21.2,12.4) 21.7,12.9 23.843,12.9 24.7,12.043 24.7,10.95 25.2,10.45 X3.2
  Bottom Layer w0.15: D3.46 12.15,11.125 13.4,11.125 13.6,10.925 18.038,10.925 19.513,12.4 v1(21.2,12.4)
pads on no net: D3.2 D3.3 D3.4 D3.8 D3.9 D3.10 D3.11 D3.14 D3.15 D3.16 D3.17 D3.24 D3.25 D3.28 D3.29 D3.30 D3.33 D3.34 D3.37 D3.38 D3.39 D3.40 D3.41 D3.42 D3.43 D3.50 D3.51 D3.52 D3.53 D3.54 D3.56 D3.57 D3.58 D3.59 D3.61 D3.62 D4.4 X1.0@2.7,6.25 X1.0@2.7,10.75 Z1.3 Z1.4

## Polygon pours and split planes (outlines as drawn)
GND on Ground "GND_L02_P009" (solid, remove dead copper, pour order 9): 0,2.5 0,14.5 cw(c2.5,14.5) 2.5,17 37.5,17 cw(c37.5,14.5) 40,14.5 40,2.5 cw(c37.5,2.5) 37.5,0 2.5,0 cw(c2.5,2.5)
GND on Power "GND_L03_P012" (solid, remove dead copper, pour order 12): 0,2.5 0,14.5 cw(c2.5,14.5) 2.5,17 37.5,17 cw(c37.5,14.5) 40,14.5 40,2.5 cw(c37.5,2.5) 37.5,0 2.5,0 cw(c2.5,2.5)
3V3 on Power "Power-No Net" (solid, remove dead copper, pour order 11): 7,13.5 7,17 9.2,17 9.2,13.5 29,13.5 29,1.5 12.6,1.5 12.6,12 7,12
5V on Power "5V_L03_P010" (solid, remove dead copper, pour order 10): 7,10 7,0 37,0 37,6.5 34.5,6.5 29.25,6.5 29.25,1.5 12.4,1.5 12.4,10

## Keep-outs
Keep-Out Layer:
  the board outline again, w0.2

## Silkscreen, mask and mechanical layers (free items; w line width, h text height)
Top Overlay:
  lines w0.2: 10.95,-14.7 14,-14.7 ; 10.95,-14.7 10.95,-13.1 14,-13.1 14,-14.7 ; 10.95,-14.7 14,-14.7 ; 10.95,-14.7 10.95,-16.3 14,-16.3 14,-14.7 ; 11.45,-9.9 14.5,-9.9 ; 11.45,-9.9 11.45,-11.5 14.5,-11.5 14.5,-9.9 ; 11.45,-9.9 14.5,-9.9 ; 11.45,-9.9 11.45,-8.3 14.5,-8.3 14.5,-9.9 ; 15.35,-13.2 18.4,-13.2 ; 15.35,-13.2 15.35,-14.8 18.4,-14.8 18.4,-13.2 ; 15.35,-13.2 18.4,-13.2 ; 15.35,-13.2 15.35,-11.6 ; 15.35,-11.6 18.4,-11.6 ; 15.35,-11.6 18.4,-11.6 ; 15.35,-11.6 15.35,-10 ; 15.35,-10 18.4,-10 ; 15.35,-10 18.4,-10 ; 15.35,-10 15.35,-8.4 18.4,-8.4 18.4,-10 ; 18.4,-13.2 18.4,-11.6 ; 18.4,-11.6 18.4,-10 ; 24.45,-15 27.5,-15 ; 24.45,-15 24.45,-13.4 27.5,-13.4 27.5,-15 ; 24.45,-15 27.5,-15 ; 24.45,-15 24.45,-16.6 27.5,-16.6 27.5,-15 ; 4.9,-17.55 4.9,-14.5 6.5,-14.5 6.5,-17.55 4.9,-17.55 ; 4.9,-5.05 4.9,-2.15 6.5,-2.15 6.5,-5.05 4.9,-5.05 ; 8.3,-7.85 8.3,-4.8 9.9,-4.8 9.9,-7.85 8.3,-7.85 ; 8.6,-11.45 8.6,-8.4 10.2,-8.4 10.2,-11.45 8.6,-11.45 ; 11.1,-8.25 11.1,-5.2 12.7,-5.2 12.7,-8.25 11.1,-8.25 ; 13.6,-7.45 13.6,-4.4 15.2,-4.4 15.2,-7.45 13.6,-7.45 ; 14.05,-16.4 17.1,-16.4 17.1,-14.8 14.05,-14.8 14.05,-16.4 ; 16.35,-5.2 16.35,-3.6 19.25,-3.6 19.25,-5.2 16.35,-5.2 ; 19.05,-16.4 22.1,-16.4 22.1,-14.8 19.05,-14.8 19.05,-16.4 ; 19.4,-12.35 19.4,-9.3 21,-9.3 21,-12.35 19.4,-12.35 ; 19.4,-9.15 19.4,-6.1 21,-6.1 21,-9.15 19.4,-9.15 ; 19.55,-5.2 19.55,-3.6 22.6,-3.6 22.6,-5.2 19.55,-5.2 ; 22.4,-13.45 22.4,-10.4 24,-10.4 24,-13.45 22.4,-13.45 ; 22.4,-8.55 22.4,-5.5 24,-5.5 24,-8.55 22.4,-8.55
  text "encrypting" at 13.4,15.6 h1
  text "pc" at 7.9,10.3 h1.52 r90
  text "swd" at 24.5,7.75 h1
  text "7" at 31.3,1.8 h5 r90
Bottom Overlay:
  drawing of 3277 lines, arcs and shapes, not listed
  text "pastilda" at 0.4,4.4 h2 r270
  text "rev.0.1" at 33.7,0.4 h1